# EAGLE board Pepino-board_v1.1 (EAGLE 6.5.0)
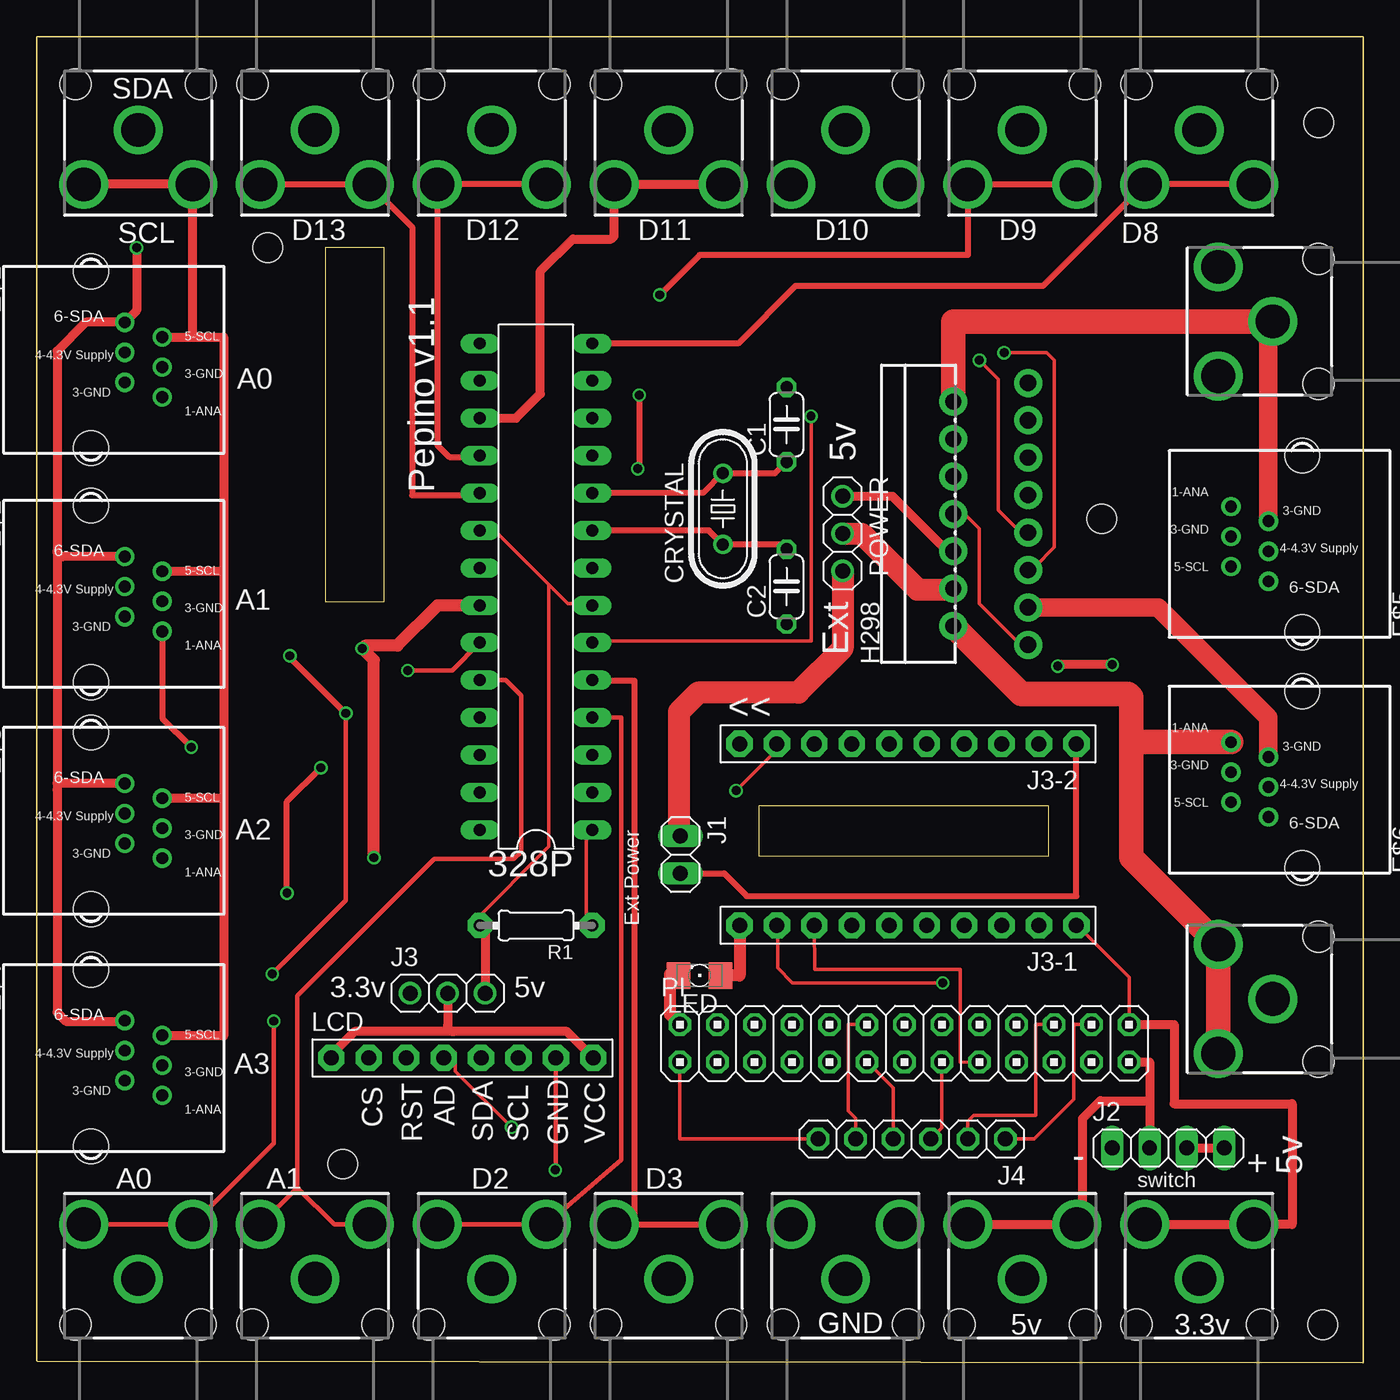
[diagram p0: board, top side]
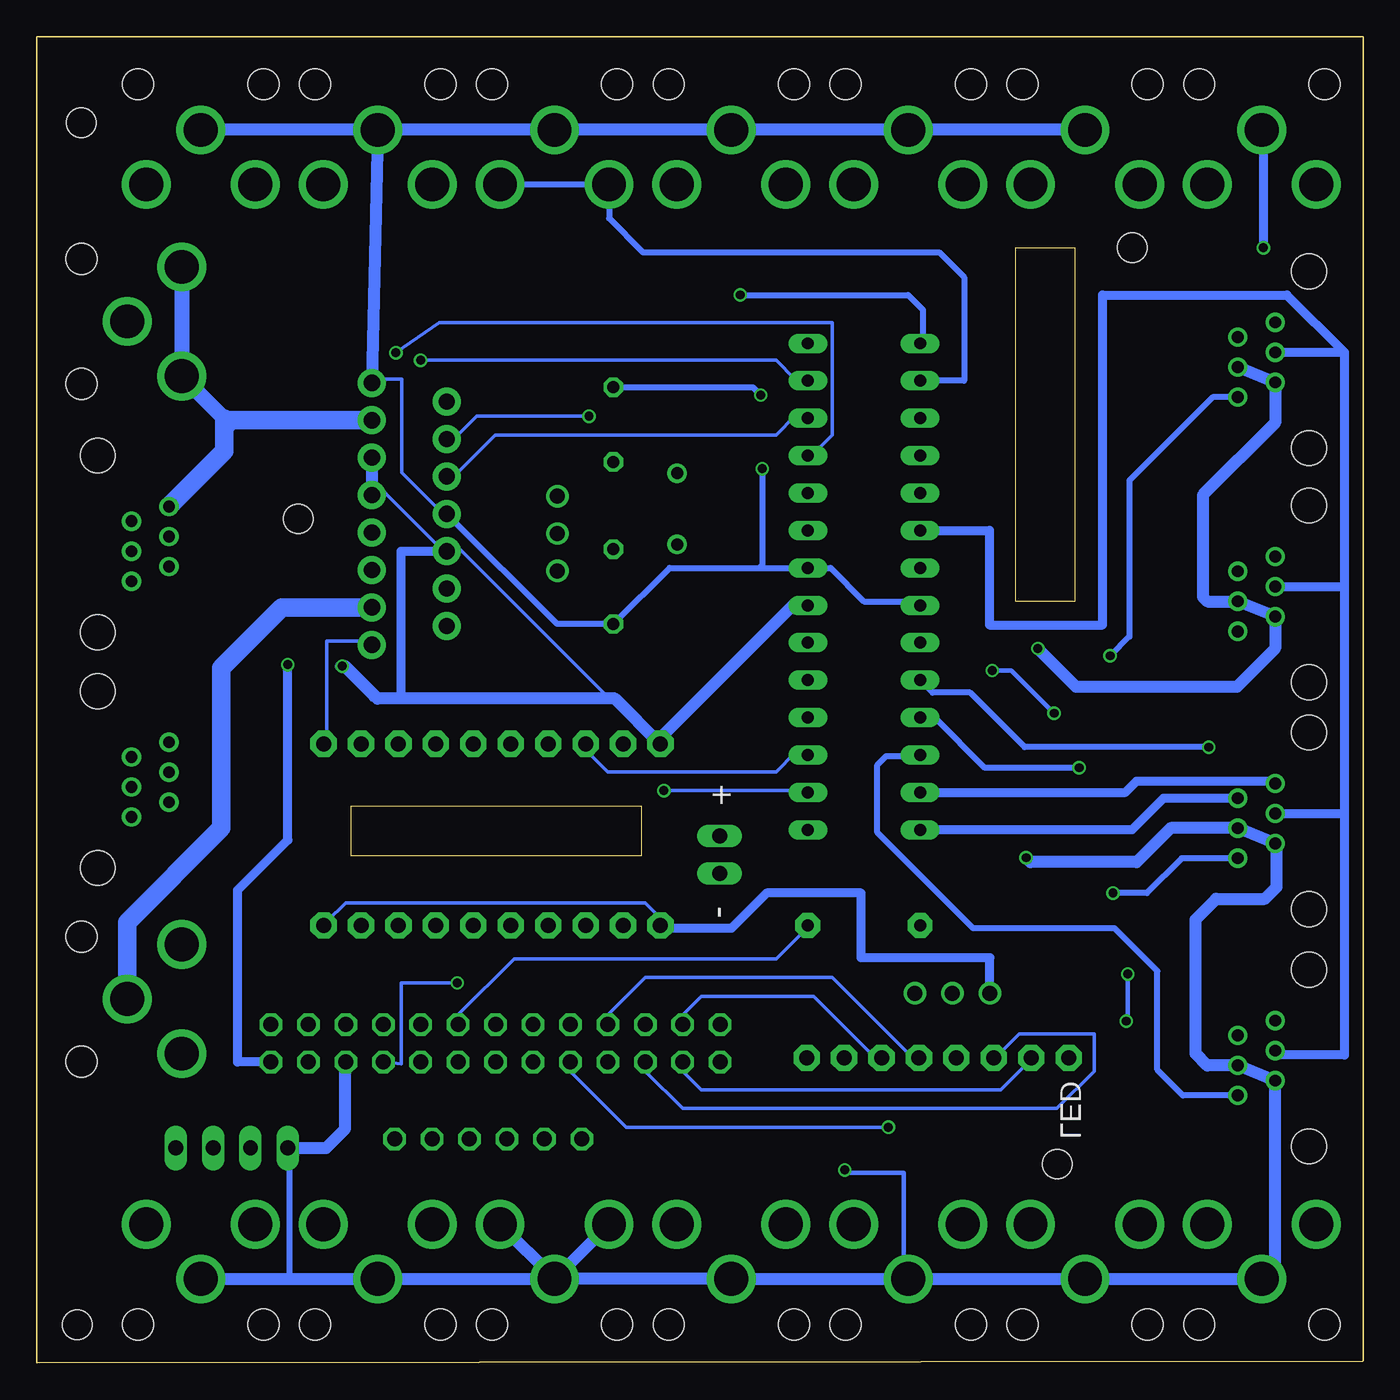
[diagram p1: board, bottom side, seen from below]

Size 90 x 90 mm. Coordinates in mm from the lower left corner, seen from the top.
Outline: 0,0.14 0,89.96 0.04,90 89.96,90 90,89.96 90,0.04 89.96,0 0.04,0.1
Copper layers (1*16): Top 0.035mm / dielectric 1.5mm / Bottom 0.035mm
Design rules "Elecrow_2-layer_eagle_rule": minimum track width 6mil, minimum drill 12mil, track to track 6mil, track to pad 6mil, pad to pad 6mil, via to via 6mil, smd to smd 0mil, copper to edge 10mil, drill to drill 10mil, minimum pad ring 10mil, minimum via ring 6mil, stop-mask expansion 2mil, vias tented up to drill 100mil, thermal gap 10mil
Net classes: 0 default: clearance 0.205 mm
Holes 2 mm at 87.27,2.58 20.77,13.48 72.27,57.28 86.97,84.18 15.67,75.68
Milling: area 19.6,51.7 to 23.6,75.7; area 49,34.4 to 68.7,37.8

## Footprints (pad centres in the part's own frame; a part is rotated, then mirrored left to right if it is on the bottom)
DIL28-3 = drill 0.813 long: 1 -16.51,-3.81; 2 -13.97,-3.81; 3 -11.43,-3.81; 4 -8.89,-3.81; 5 -6.35,-3.81; 6 -3.81,-3.81; 7 -1.27,-3.81; 8 1.27,-3.81; 9 3.81,-3.81; 10 6.35,-3.81; 11 8.89,-3.81; 12 11.43,-3.81; 13 13.97,-3.81; 14 16.51,-3.81; 15 16.51,3.81; 16 13.97,3.81; 17 11.43,3.81; 18 8.89,3.81; 19 6.35,3.81; 20 3.81,3.81; 21 1.27,3.81; 22 -1.27,3.81; 23 -3.81,3.81; 24 -6.35,3.81; 25 -8.89,3.81; 26 -11.43,3.81; 27 -13.97,3.81; 28 -16.51,3.81
C050-024X044 = drill 0.813 octagon: 1 -2.54,0; 2 2.54,0
HC49/S = drill 0.813: 1 -2.413,0; 2 2.413,0
YH-55-10 = drill 0.8 pad 1.3: 1 2.54,4.84; 2 1.54,2.3; 3 0.5,4.84; 4 -0.5,2.3; 5 -1.54,4.84; 6 -2.54,2.3 | hole 2.36: -6,0; 6,0
RCA = drill 2.3: BARREL 0,0; BREAK 3.7,3.7; SPRING 3.7,-3.7 | hole 2.1: -3.1,4.25; -3.1,-4.25
MULTIWATT15 = drill 1.1 pad 1.9: 1 -8.95,-2.39; 2 -7.68,2.69; 3 -6.41,-2.39; 4 -5.14,2.69; 5 -3.87,-2.39; 6 -2.6,2.69; 7 -1.33,-2.39; 8 -0.06,2.69; 9 1.21,-2.39; 10 2.48,2.69; 11 3.75,-2.39; 12 5.02,2.69; 13 6.29,-2.39; 14 7.56,2.69; 15 8.83,-2.39
1X02 = drill 1.016 long: 1 -1.27,0; 2 1.27,0
1X04 = drill 1.016 long: 1 -3.81,0; 2 -1.27,0; 3 1.27,0; 4 3.81,0
1X03 = drill 1.016: 1 -2.54,0; 2 0,0; 3 2.54,0
1X10-BIG = drill 1.016 pad 1.778 octagon: 1 -11.43,0; 2 -8.89,0; 3 -6.35,0; 4 -3.81,0; 5 -1.27,0; 6 1.27,0; 7 3.81,0; 8 6.35,0; 9 8.89,0; 10 11.43,0
1X06 = drill 1.016 octagon: 1 -6.35,0; 2 -3.81,0; 3 -1.27,0; 4 1.27,0; 5 3.81,0; 6 6.35,0
1X08-BIG = drill 1.016 pad 1.778 octagon: 1 -8.89,0; 2 -6.35,0; 3 -3.81,0; 4 -1.27,0; 5 1.27,0; 6 3.81,0; 7 6.35,0; 8 8.89,0
1206 = smd 1.6 x 1.803: A -1.422,0; C 1.422,0
2X13 = drill 1.016 octagon: 1 -15.24,-1.27; 2 -15.24,1.27; 3 -12.7,-1.27; 4 -12.7,1.27; 5 -10.16,-1.27; 6 -10.16,1.27; 7 -7.62,-1.27; 8 -7.62,1.27; 9 -5.08,-1.27; 10 -5.08,1.27; 11 -2.54,-1.27; 12 -2.54,1.27; 13 0,-1.27; 14 0,1.27; 15 2.54,-1.27; 16 2.54,1.27; 17 5.08,-1.27; 18 5.08,1.27; 19 7.62,-1.27; 20 7.62,1.27; 21 10.16,-1.27; 22 10.16,1.27; 23 12.7,-1.27; 24 12.7,1.27; 25 15.24,-1.27; 26 15.24,1.27
0204/7 = drill 0.813 pad 1.676 octagon: 1 -3.81,0; 2 3.81,0

## Placement (x,y rotation side)
328P  [DIL28-3]  33.87,52.68 90 top
C1  [C050-024X044]  50.87,63.68 90 top
C2  [C050-024X044]  50.87,52.68 90 top
CRYSTAL  [HC49/S]  46.55,57.96 90 top
E$1  [YH-55-10]  3.67,68.08 270 top
E$2  [YH-55-10]  3.67,52.18 270 top
E$3  [YH-55-10]  3.67,36.78 270 top
E$4  [YH-55-10]  3.67,20.68 270 top
E$5  [YH-55-10]  85.87,55.58 90 top
E$6  [YH-55-10]  85.87,39.58 90 top
E$9  [RCA]  78.87,83.68 270 top
E$10  [RCA]  66.87,83.68 270 top
E$11  [RCA]  54.87,83.68 270 top
E$12  [RCA]  42.87,83.68 270 top
E$13  [RCA]  30.87,83.68 270 top
E$14  [RCA]  18.87,83.68 270 top
E$15  [RCA]  6.87,83.68 270 top
E$22  [RCA]  6.87,5.68 90 top
E$23  [RCA]  18.87,5.68 90 top
E$24  [RCA]  30.87,5.68 90 top
E$25  [RCA]  42.87,5.68 90 top
E$26  [RCA]  54.87,5.68 90 top
E$27  [RCA]  66.87,5.68 90 top
E$28  [RCA]  78.87,5.68 90 top
E$29  [RCA]  83.87,70.68 180 top
E$30  [RCA]  83.87,24.68 180 top
H298  [MULTIWATT15]  64.87,57.68 90 top
J1  [1X02]  43.67,34.48 270 top
J2  [1X04]  76.77,14.58 0 top
J3  [1X03]  27.87,25.08 0 top
J3-1  [1X10-BIG]  59.11,29.69 180 top
J3-2  [1X10-BIG]  59.11,42.01 180 top
J4  [1X06]  59.37,15.18 180 top
LCD  [1X08-BIG]  28.87,20.68 0 top
LED  [1206]  44.97,26.28 180 top
PI  [2X13]  58.87,21.68 0 top
POWER  [1X03]  54.67,56.28 270 top
R1  [0204/7]  33.87,29.68 180 top

## Library data of the parts
328P C1 C2 CRYSTAL J3 J3-1 J3-2 J4 LCD POWER R1 = adafruit
E$1-E$6 = Dexter_Industries_Eagle_Library_Female_Sockets
E$9-E$15 E$22-E$30 H298 = SparkFun
J1 J2 PI = pinhead
LED = led

## Nets
S$1: J4.1 PI.24
S$2: 328P.9 C2.2 CRYSTAL.1
S$3: 328P.10 C1.1 CRYSTAL.2
S$4: E$28.BREAK E$28.SPRING J3-1.1 J3-1.10 J3.1 LED.A PI.26
S$5: H298.4 POWER.2
S$6: 328P.7 328P.20 E$1.4 E$2.4 E$3.4 E$4.4 E$27.BREAK E$27.SPRING H298.6 H298.9 H298.11 J2.2 J3-2.10 J3.3 PI.25 POWER.1 R1.2
S$7: LCD.6 PI.4
S$8: LCD.5 PI.8
S$9: LCD.4 PI.9
S$10: LCD.3 PI.5
S$11: LCD.2 PI.3
S$12: 328P.1 PI.16 R1.1
S$13: J3-1.9 PI.19
S$14: J3-1.8 PI.17
S$15: 328P.2 J3-2.9
S$16: 328P.3 J3-2.8
S$17: 328P.23 E$1.1 E$22.BREAK E$22.SPRING
S$18: 328P.24 E$2.1 E$23.BREAK E$23.SPRING
S$19: 328P.25 E$3.1
S$20: 328P.26 E$4.1
S$21: E$6.1 E$30.BREAK E$30.SPRING H298.2
S$22: E$6.2 E$30.BARREL H298.3
S$23: 328P.19 E$14.BREAK E$14.SPRING
S$24: 328P.18 E$13.BREAK E$13.SPRING
S$25: 328P.17 E$12.BREAK E$12.SPRING
S$26: 328P.28 E$1.5 E$2.5 E$3.5 E$4.5 E$15.BREAK E$15.SPRING
S$27: 328P.27 E$1.6 E$2.6 E$3.6 E$4.6 E$15.BARREL
S$28: 328P.16 E$11.BREAK E$11.SPRING
S$29: 328P.15 E$10.BREAK E$10.SPRING
S$30: 328P.14 E$9.BREAK E$9.SPRING
S$31: J3.2 LCD.1 LCD.8
S$32: E$5.1 E$29.BREAK E$29.SPRING H298.13
S$33: E$5.2 E$29.BARREL H298.14
S$34: 328P.11 H298.5
S$35: 328P.12 H298.10
S$36: 328P.4 E$24.BREAK E$24.SPRING
S$37: 328P.5 E$25.BREAK E$25.SPRING
S$38: J4.2 PI.22
S$39: 328P.13 H298.7
S$40: 328P.6 H298.12
S$41: J4.3 PI.15
S$42: J4.4 PI.11
S$43: J4.5 PI.12
S$44: J4.6 PI.1
S$45: J2.3 J2.4
S$46: J1.1 POWER.3
S$47: 328P.8 328P.22 C1.2 C2.1 E$1.2 E$1.3 E$2.2 E$2.3 E$3.2 E$3.3 E$4.2 E$4.3 E$9.BARREL E$10.BARREL E$11.BARREL E$12.BARREL E$13.BARREL E$14.BARREL E$22.BARREL E$23.BARREL E$24.BARREL E$25.BARREL E$26.BARREL E$26.BREAK E$26.SPRING E$27.BARREL E$28.BARREL H298.1 H298.8 H298.15 J1.2 J2.1 J3-2.1 LCD.7 PI.21
S$48: LED.C PI.2

## Tracks (layer width: path | path; a pad name or v marks a point on that pad's centre or on a via)
S$1
  Top 0.254: PI.24 70.4,22.95 70.37,22.98 70.37,17.88 67.67,15.18 J4.1
S$2
  Top 0.406: C2.2 50.55,55.55 CRYSTAL.1 45.61,56.49 328P.9
S$3
  Top 0.406: C1.1 50.11,60.37 CRYSTAL.2 45.21,59.03 328P.10
S$4
  Top 0.254: J3-1.1 70.31,29.95 74.12,26.14 74.12,23.6 PI.26
  Top 0.61: PI.26 77.17,22.95 77.17,17.58 85.17,17.58 85.17,9.38 E$28.SPRING E$28.BREAK
  Top 0.813: J3-1.10 47.68,26.28 LED.A
  Bottom 0.254: J3-1.10 47.45,29.95 48.72,31.22 69.04,31.22 70.31,29.95 J3-1.1
  Bottom 0.61: J3.1 25.33,27.48 34.07,27.48 34.07,31.88 40.47,31.88 42.87,29.48 47.47,29.48 J3-1.10
S$5
  Top 1.5: POWER.2 55.97,56.28 59.77,52.48 62.12,52.48 H298.4
S$6  (via drill 0.6)
  Top 0.254: 34.75,52.81 36.02,51.54 37.29,51.54 328P.7 | 34.75,52.81 30.94,56.62 328P.20 | 34.75,52.81 34.75,35.03 29.67,29.95 R1.2 | 61.58,55.3 61.97,55.3 H298.6
  Top 0.61: POWER.1 58.05,58.82 61.58,55.3 | PI.25 75.5,20.41 75.5,17.78 | 75.5,17.78 J2.2 | E$27.SPRING E$27.BREAK 70.97,9.38 70.97,16.58 72.17,17.78 75.5,17.78 | v72.97,47.38 69.27,47.38 v69.27,47.28 | R1.2 arc-90 30.41,29.33 J3.3
  Bottom 0.254: H298.9 66.5,59.16 62.69,55.35 H298.6 61.42,55.35 48.72,42.65 47.45,42.65 J3-2.10 | 38.56,51.54 328P.7
  Bottom 0.61: E$1.4 1.27,68.58 | 1.27,68.58 1.27,52.68 | 1.27,52.68 1.27,37.28 | 1.27,37.28 1.27,20.88 5.97,20.88 E$4.4 | E$2.4 1.27,52.68 | E$3.4 1.27,37.28 | 328P.20 25.37,56.49 25.37,50.08 17.67,50.08 17.67,72.48 5.17,72.48 1.27,68.58 | PI.25 76.37,20.41 76.37,32.08 72.97,35.48 v72.97,47.38 | v69.27,47.28 67.17,45.18 65.27,45.18 65.27,55.08 H298.6
  Bottom 0.813: 47.45,42.65 38.56,51.54 | H298.11 H298.9 | J3-2.10 50.75,45.08 66.87,45.08 69.07,47.28 69.37,47.28
S$7
  Bottom 0.254: PI.4 46.18,23.6 44.91,24.87 37.29,24.87 33.48,21.06 LCD.6
S$8
  Bottom 0.254: PI.8 51.26,23.6 48.72,26.14 36.02,26.14 30.94,21.06 LCD.5
S$9  (via drill 0.61)
  Top 0.254: v32.21,15.98 28.4,19.79 28.4,21.06 LCD.4
  Bottom 0.254: v32.21,15.98 49.99,15.98 53.8,19.79 PI.9
S$10
  Bottom 0.254: PI.5 48.72,19.79 46.18,17.25 20.78,17.25 18.24,19.79 18.24,22.33 23.32,22.33 24.59,21.06 LCD.3
S$11
  Bottom 0.254: PI.3 46.18,19.79 44.91,18.52 24.59,18.52 22.05,21.06 LCD.2
S$12
  Top 0.254: 328P.1 37.29,36.3 37.29,29.95 R1.1
  Bottom 0.254: PI.16 61.42,23.6 57.61,27.41 39.83,27.41 37.29,29.95 R1.1
S$13  (via drill 0.6)
  Top 0.254: v61.47,25.78 51.27,25.78 50.27,26.78 50.27,29.64 J3-1.9
  Bottom 0.254: PI.19 65.27,20.28 65.27,25.78 v61.47,25.78
S$14
  Top 0.254: PI.17 62.67,20.38 62.67,26.68 52.77,26.68 J3-1.8
S$15  (via drill 0.61)
  Top 0.254: v47.45,38.84 49.99,41.38 J3-2.9
  Bottom 0.254: v47.45,38.84 38.56,38.84 328P.2
S$16
  Bottom 0.254: 328P.3 38.56,41.38 39.83,40.11 51.26,40.11 52.53,41.38 J3-2.8
S$17  (via drill 0.6)
  Top 0.305: E$22.BREAK E$22.SPRING 16.07,14.88 v16.07,23.18 | v15.97,26.38 20.97,31.38 v20.97,44.08 | v25.17,46.98 28.17,46.98 328P.23
  Top 0.406: v17.17,47.98 17.17,47.88 v20.97,44.08
  Bottom 0.305: v16.07,23.18 15.97,23.28 v15.97,26.38 | v20.97,44.08 23.87,46.98 v25.17,46.98
  Bottom 0.406: E$1.1 10.21,65.54 15.87,59.88 15.87,49.28 v17.17,47.98
S$18  (via drill 0.6)
  Top 0.305: 17.67,11.88 17.67,24.88 26.97,34.18 32.37,34.18 32.87,34.68 32.87,45.28 31.82,46.33 328P.24 | 17.67,11.88 E$23.BREAK | E$23.SPRING 20.17,9.38 17.67,11.88
  Top 0.406: E$2.1 8.51,43.74 v10.47,41.78
  Bottom 0.406: v10.47,41.78 22.97,41.78 26.67,45.48 29.21,45.48 328P.24
S$19  (via drill 0.6)
  Top 0.406: v16.97,31.88 16.97,38.08 v19.27,40.38
  Bottom 0.406: E$3.1 12.31,34.24 14.67,31.88 v16.97,31.88 | v19.27,40.38 25.67,40.38 29.07,43.78 328P.25
S$20
  Bottom 0.406: E$4.1 12.23,18.14 13.97,19.88 13.97,26.58 16.87,29.48 26.47,29.48 32.97,35.98 32.97,40.58 32.37,41.18 30.13,41.18 328P.26
S$21
  Top 1.676: E$30.BREAK E$30.SPRING 74.27,34.28 74.27,42.08 | 74.27,42.08 74.27,42.78 | 74.27,42.78 74.28,42.78 | H298.2 66.8,45.38 74.07,45.38 74.27,45.18 74.27,42.78 | E$6.1 74.31,42.12 74.27,42.08
S$22
  Top 1.27: E$6.2 83.57,43.78 76.08,51.27 H298.3
  Bottom 1.27: E$30.BARREL 83.87,29.88 77.47,36.28 77.47,47.17 73.37,51.27 H298.3
S$23
  Top 0.406: E$14.SPRING E$14.BREAK 25.47,77.08 25.47,58.88 29.91,58.88 arc90 328P.19
S$24
  Top 0.406: E$13.BREAK E$13.SPRING 27.17,62.28 27.97,61.48 29.97,61.48 328P.18
S$25
  Top 0.61: 328P.17 32.5,64.11 34.17,65.78 34.17,74.08 36.37,76.28 38.97,76.28 39.17,76.48 E$12.SPRING E$12.BREAK
S$26
  Top 0.61: E$15.SPRING E$15.BREAK 10.57,69.62 E$1.5 12.67,69.62 12.67,53.72 | 12.67,53.72 12.67,38.32 | E$4.5 8.51,22.18 12.67,22.18 12.67,38.18 12.67,38.32 | E$2.5 12.67,53.72 | E$3.5 12.67,38.32
  Bottom 0.61: 328P.28 15.67,36.18 13.53,38.32 E$3.5
S$27  (via drill 0.6)
  Top 0.61: v6.77,75.68 6.77,71.42 E$1.6 3.31,70.62 1.37,68.68 1.37,55.08 | 1.37,55.08 1.37,39.32 | E$4.6 5.93,23.18 1.97,23.18 1.37,23.78 1.37,38.88 1.37,39.32 | E$2.6 1.73,54.72 arc-90 1.37,55.08 | E$3.6 1.37,39.32
  Bottom 0.61: E$15.BARREL 6.77,83.58 v6.77,75.68 | 328P.27 16.14,38.71 15.37,39.48 6.13,39.48 E$3.6
S$28
  Bottom 0.406: E$11.BREAK E$11.SPRING 51.17,77.68 48.87,75.38 28.77,75.38 27.07,73.68 27.07,66.65 328P.16
S$29  (via drill 0.6)
  Top 0.406: v42.27,72.48 44.97,75.18 63.17,75.18 E$10.SPRING E$10.BREAK
  Bottom 0.406: v42.27,72.48 30.87,72.48 29.87,71.48 29.87,69.38 328P.15
S$30
  Top 0.406: E$9.BREAK E$9.SPRING 68.27,73.08 51.47,73.08 47.58,69.19 328P.14
S$31
  Top 0.254: 37.29,21.06 LCD.8
  Top 0.61: LCD.8 35.96,22.48 28.27,22.48 | 28.27,22.48 21.57,22.48 19.98,20.89 LCD.1 | J3.2 27.87,22.88 arc90 28.27,22.48
S$32
  Bottom 1.016: E$29.SPRING E$29.BREAK 77.27,64.08 76.98,63.79
  Bottom 1.27: E$5.1 77.27,61.88 77.27,64.08 | 76.98,63.79 76.8,63.97 H298.13
S$33
  Top 1.27: E$29.BARREL 83.57,70.38 E$5.2
  Top 1.676: E$29.BARREL 62.18,70.68 H298.14
S$34  (via drill 0.61)
  Top 0.254: H298.5 67.77,54.08 69.04,55.35 69.04,68.05 68.54,68.55 v65.63,68.55
  Bottom 0.254: v65.63,68.55 62.69,70.59 36.02,70.59 36.02,62.97 37.29,61.7 328P.11
S$35
  Bottom 0.254: 328P.12 38.56,64.24 39.83,62.97 58.88,62.97 61.42,60.43 H298.10
S$36
  Top 0.305: E$24.BREAK E$24.SPRING 39.67,13.78 39.67,43.79 328P.4
S$37
  Top 0.406: E$25.SPRING E$25.BREAK 40.57,9.38 40.57,46.28 37.68,46.28 328P.5
S$38
  Top 0.254: PI.22 67.77,22.95 67.77,16.78 63.57,16.78 63.17,16.38 J4.2
S$39  (via drill 0.61)
  Top 0.254: v63.96,68.05 65.23,66.78 65.23,57.89 66.5,56.62 H298.7
  Bottom 0.254: v63.96,68.05 39.83,68.05 38.56,66.78 328P.13
S$40  (via drill 0.61)
  Top 0.254: v52.53,64.24 52.53,49 38.56,49 328P.6
  Bottom 0.254: v52.53,64.24 60.15,64.24 61.42,62.97 H298.12
S$41
  Top 0.254: PI.15 61.41,15.95 J4.3
S$42
  Top 0.254: PI.11 58.1,18.64 J4.4
S$43
  Top 0.254: PI.12 55.07,22.95 55.07,17.08 55.56,16.59 J4.5
S$44
  Top 0.254: PI.1 43.63,15.18 J4.6
S$45
  Top 0.61: J2.3 J2.4
S$46
  Top 1.5: POWER.3 54.67,48.48 51.67,45.48 44.87,45.48 43.57,44.18 43.57,35.85 J1.1
S$47  (via drill 0.6)
  Top 0.254: H298.1 66.5,49 63.96,51.54 63.96,56.62 62.69,57.89 H298.8
  Top 0.305: v35.17,13.08 35.22,13.08 LCD.7
  Top 0.4: J1.2 46.64,33.21 48.17,31.68 70.54,31.68 J3-2.1
  Top 0.406: v40.87,65.68 40.87,60.78 v40.77,60.68
  Top 0.813: v22.87,34.28 22.87,47.68 v22.07,48.48 22.27,48.68 24.47,48.68 27.2,51.41 328P.22
  Bottom 0.254: J3-2.1 70.31,42.65 70.31,49 67.77,49 H298.1 | H298.8 62.69,57.89 65.23,60.43 65.23,66.78 66.5,66.78 H298.15
  Bottom 0.305: E$24.BARREL 31.17,5.68 31.17,12.88 35.17,12.88 v35.17,13.08
  Bottom 0.406: J2.1 72.87,14.49 72.87,5.68 E$28.BARREL | 40.97,53.95 47.06,53.95 C2.1 54.7,50.14 H298.8 | 40.97,53.95 328P.8 36.14,53.95 33.87,51.68 30.33,51.68 328P.22 | C1.2 41.41,66.22 v40.87,65.68 | v40.77,60.68 40.77,54.15 40.97,53.95
  Bottom 0.813: E$14.BARREL E$13.BARREL E$12.BARREL E$11.BARREL E$10.BARREL | E$28.BARREL E$27.BARREL E$26.BARREL | E$26.BARREL E$26.SPRING | E$26.BARREL E$26.BREAK | E$26.BARREL E$25.BARREL E$24.BARREL E$23.BARREL E$22.BARREL 5.97,6.58 E$4.2 E$4.3 10.57,20.18 11.37,20.98 11.37,30.08 9.97,31.48 6.67,31.48 5.87,32.28 5.87,35.14 E$3.2 E$3.3 13.07,36.28 15.37,33.98 22.57,33.98 v22.87,34.28 | E$10.BARREL E$9.BARREL | E$10.BARREL H298.15 | E$1.3 E$1.2 5.97,63.78 10.87,58.88 10.87,51.98 10.57,51.68 E$2.3 E$2.2 5.97,48.48 8.57,45.88 19.47,45.88 v22.07,48.48 | J2.1 70.37,14.58 69.07,15.88 69.07,20.37 PI.21
S$48
  Top 0.813: PI.2 42.97,23.61 42.97,26.38 43.07,26.28 LED.C

## Text on the board
tPlace: SDA | D13 | D12 | D11 | D10 | D9 | SCL | D8 | A0 | 5v | Pepino v1.1 | Ext | A1 | << | A2 | Ext Power | A3 | - | + | 5v | A0 | A1 | D2 | D3 | switch | GND | 5v | 3.3v
bPlace: + | - | LED
tNames: 3.3v | 5v | CS | AD | RST | SDA | SCL | GND | VCC